# EAGLE board Daring Migelo-Trug (EAGLE 9.7.0)

Size 189.16 x 94.9 mm. Coordinates in mm from the lower left corner, seen from the top.
Outline: 0,0 189.16,0 189.16,94.9 0,94.9 0,0
Copper layers (1*16): Top 0.035mm / dielectric 1.5mm / Bottom 0.035mm
Design rules "default": minimum track width 6mil, minimum drill 0.35mm, track to track 6mil, track to pad 6mil, pad to pad 6mil, via to via 6mil, smd to smd 6mil, copper to edge 40mil, drill to drill 6mil, minimum pad ring 10mil, minimum via ring 8mil, stop-mask expansion 4mil, vias tented up to drill 0mil, thermal gap 10mil

## Footprints (pad centres in the part's own frame; a part is rotated, then mirrored left to right if it is on the bottom)
PIEZO = drill 1 pad 1.6: 1 -3.5,0; 2 3.5,0
RESAD1016W63L850D250B = drill 0.83 pad 1.43: 1 -5.08,0; 2 5.08,0
GL5528 = drill 0.8 pad 1.4: 1 -1.702,0; 2 1.702,0
HA-06-SM065 = drill 1 pad 1.676: 1 -2.54,-2.54; 2 0,2.54; 3 2.54,-2.54
SWITCH-MOMENTARY-PTH-6.5MM = drill 1.016 pad 1.88: 1 -3.251,2.261; 2 3.251,2.261; 3 -3.251,-2.261; 4 3.251,-2.261
ARDUINO-UNO-R3-SHIELD = drill 1.016 pad 1.88: 3.3V 24.13,-2.54; 5V 24.13,0; A0 24.13,12.7; A1 24.13,15.24; A2 24.13,17.78; A3 24.13,20.32; A4 24.13,22.86; A5 24.13,25.4; AREF -24.13,-13.97; D2 -24.13,20.32; D3 -24.13,17.78; D4 -24.13,15.24; D5 -24.13,12.7; D6 -24.13,10.16; D7 -24.13,7.62; D8 -24.13,3.81; D9 -24.13,1.27; D10 -24.13,-1.27; D11 -24.13,-3.81; D12 -24.13,-6.35; D13 -24.13,-8.89; GND@0 24.13,2.54; GND@1 24.13,5.08; GND@2 -24.13,-11.43; IOREF 24.13,-7.62; NC 24.13,-10.16; RES 24.13,-5.08; RX -24.13,25.4; SCL -24.13,-19.05; SDA -24.13,-16.51; TX -24.13,22.86; VIN 24.13,7.62

## Placement (x,y rotation side)
PIEZO4  PIEZO  [PIEZO]  34.36,81.32 0 top
R6  10k  [RESAD1016W63L850D250B]  141.67,19.13 90 top
R7  10k  [RESAD1016W63L850D250B]  118.81,19.13 90 top
R8  100  [RESAD1016W63L850D250B]  28.01,76.24 270 top
R9  PHOTOCELL_GL5528  [GL5528]  183.58,16.59 0 top
R10  10k  [RESAD1016W63L850D250B]  126.43,8.97 90 top
R11  10k  [RESAD1016W63L850D250B]  134.05,8.97 90 top
RPOT1  250k  [HA-06-SM065]  169.61,41.99 0 top
RPOT2  250k  [HA-06-SM065]  156.91,41.99 0 top
S1  SWITCH_MOMENTARY  [SWITCH-MOMENTARY-PTH-6.5MM]  139.13,38.18 90 top
S2  SWITCH_MOMENTARY  [SWITCH-MOMENTARY-PTH-6.5MM]  116.27,38.18 90 top
S3  SWITCH_MOMENTARY  [SWITCH-MOMENTARY-PTH-6.5MM]  131.51,20.4 90 top
S4  SWITCH_MOMENTARY  [SWITCH-MOMENTARY-PTH-6.5MM]  123.89,20.4 90 top
U1  ARDUINO-UNO-R3-SHIELD  [ARDUINO-UNO-R3-SHIELD]  47.88,40.77 270 top

## Library data of the parts
PIEZO4 R6-R11 RPOT1 RPOT2 S1-S4 U1 = Tinkercad

## Nets
PIEZO4_1: PIEZO4.1 R8.1
R6_2: R6.1 R6.2
R7_2: R7.1 R7.2
U1_5V: R9.2 R10.1 R11.1 S1.1 S1.2 S2.1 S2.2 S3.1 S3.2 S4.1 S4.2 U1.5V U1.D3 U1.D5 U1.D7 U1.D9
U1_A0: RPOT1.2 U1.A0
U1_A1: RPOT2.2 U1.A1
U1_D13: R8.2 U1.D13
U1_GND: PIEZO4.2 R9.1 R10.2 R11.2 RPOT1.1 RPOT1.3 RPOT2.1 RPOT2.3 S1.3 S1.4 S2.3 S2.4 S3.3 S3.4 S4.3 S4.4 U1.A2 U1.GND@0 U1.GND@1 U1.GND@2

## Tracks (layer width: path | path; a pad name or v marks a point on that pad's centre or on a via)
PIEZO4_1  (1 unrouted)
R6_2  (1 unrouted)
R7_2  (1 unrouted)
U1_5V  (15 unrouted)
U1_A0  (1 unrouted)
U1_A1  (1 unrouted)
U1_D13  (1 unrouted)
U1_GND  (19 unrouted)